# Altium PCB HB_mini_panel.PcbDoc
Units mm, origin at the board's own origin, x right, y up, seen from the top; angles counter-clockwise.
Board outline 70 x 70 mm, 2 copper layers (Top Layer, Bottom Layer), stack 0.971 mm thick; 4 components, 0 nets, 4 pads, 0 vias.
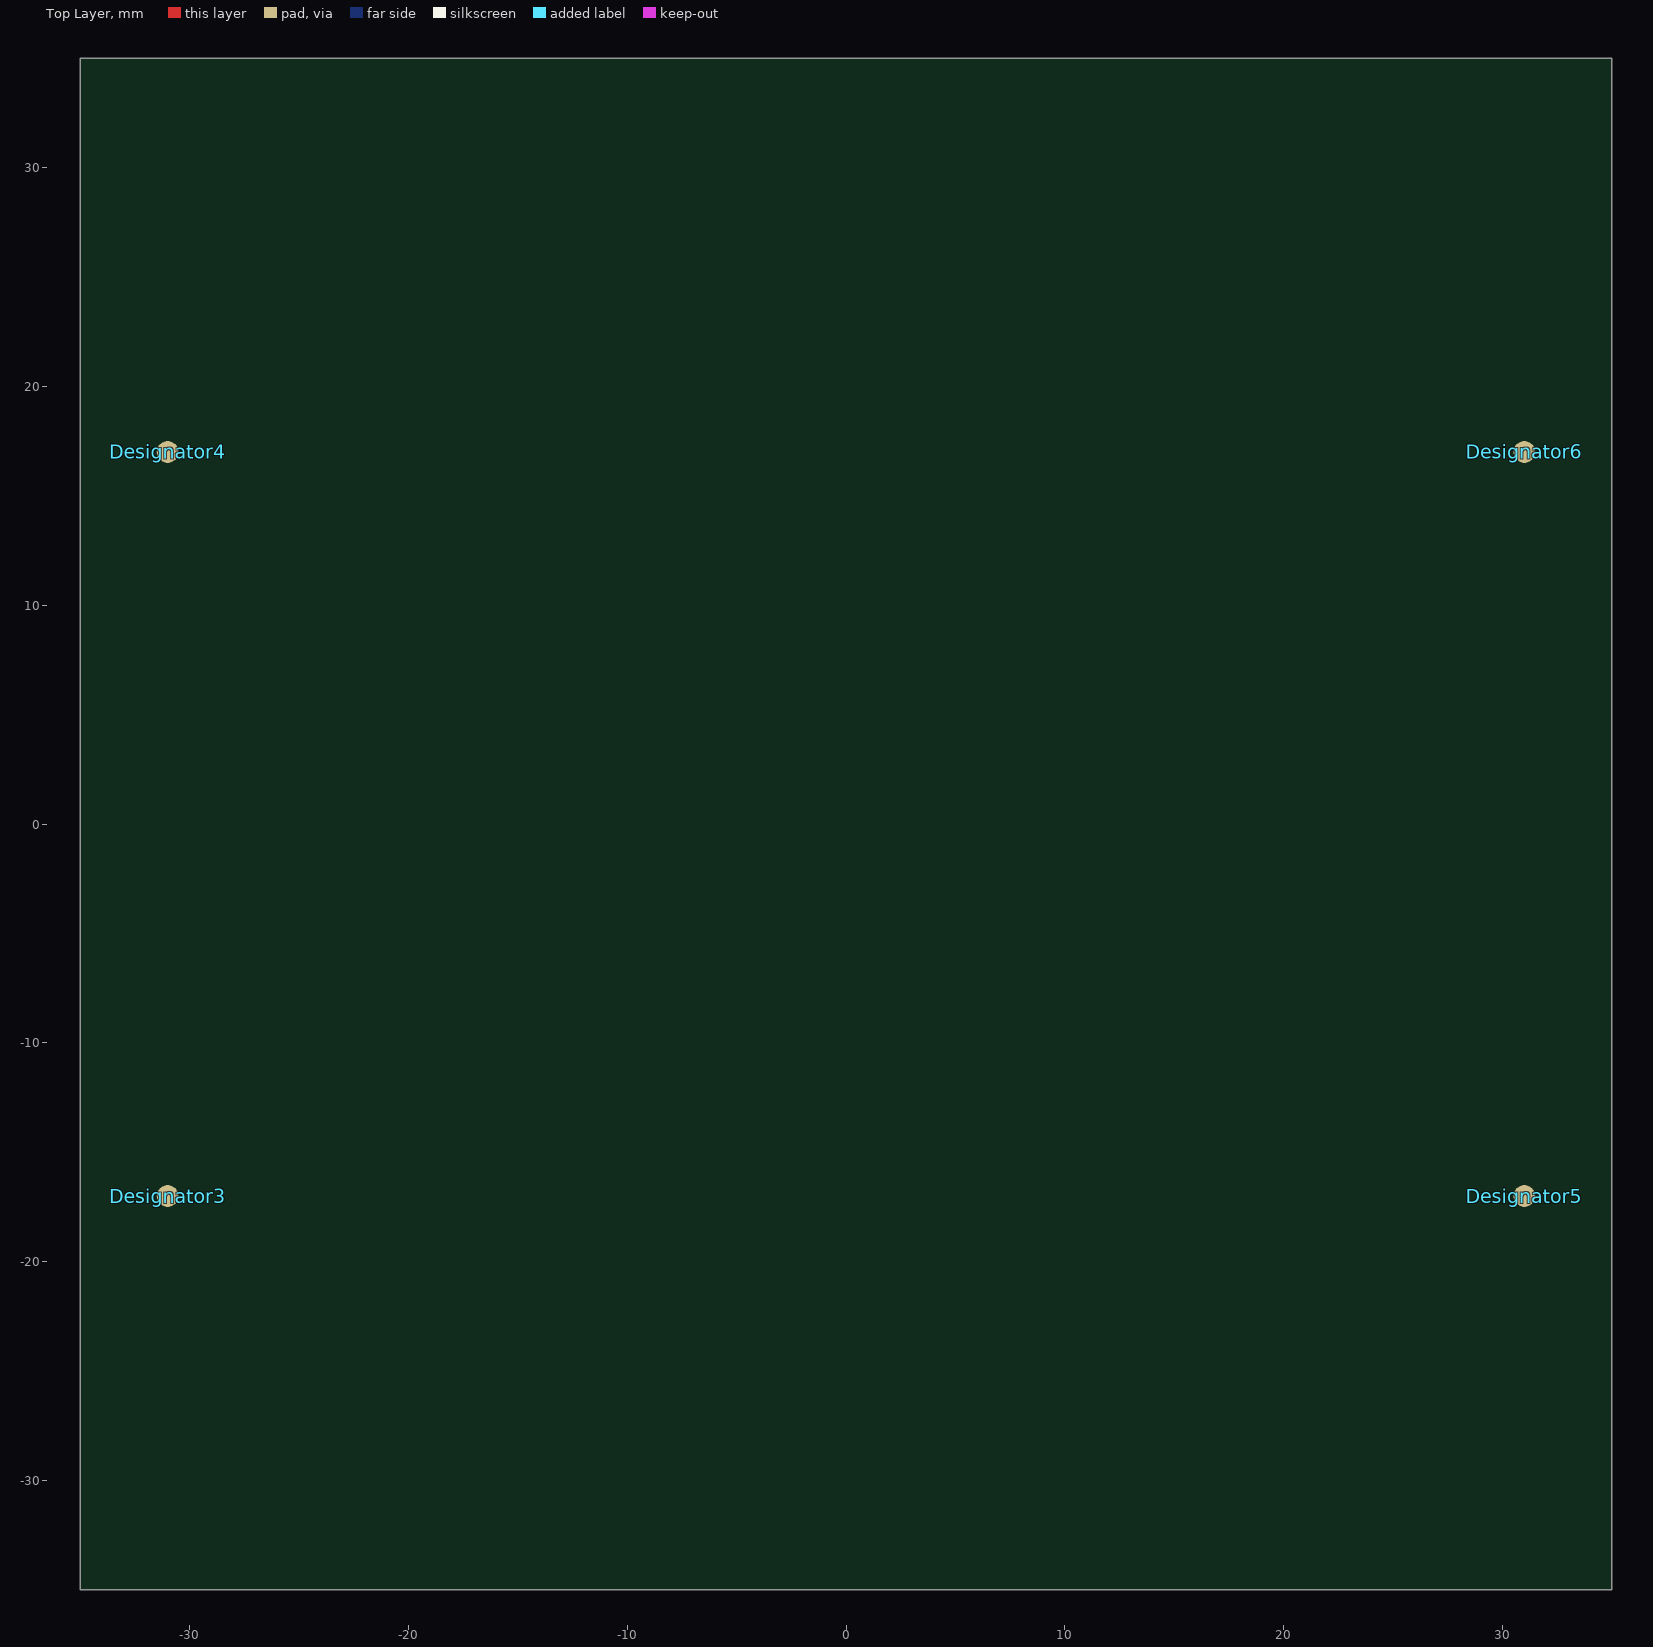
[diagram p0: Top Layer view]
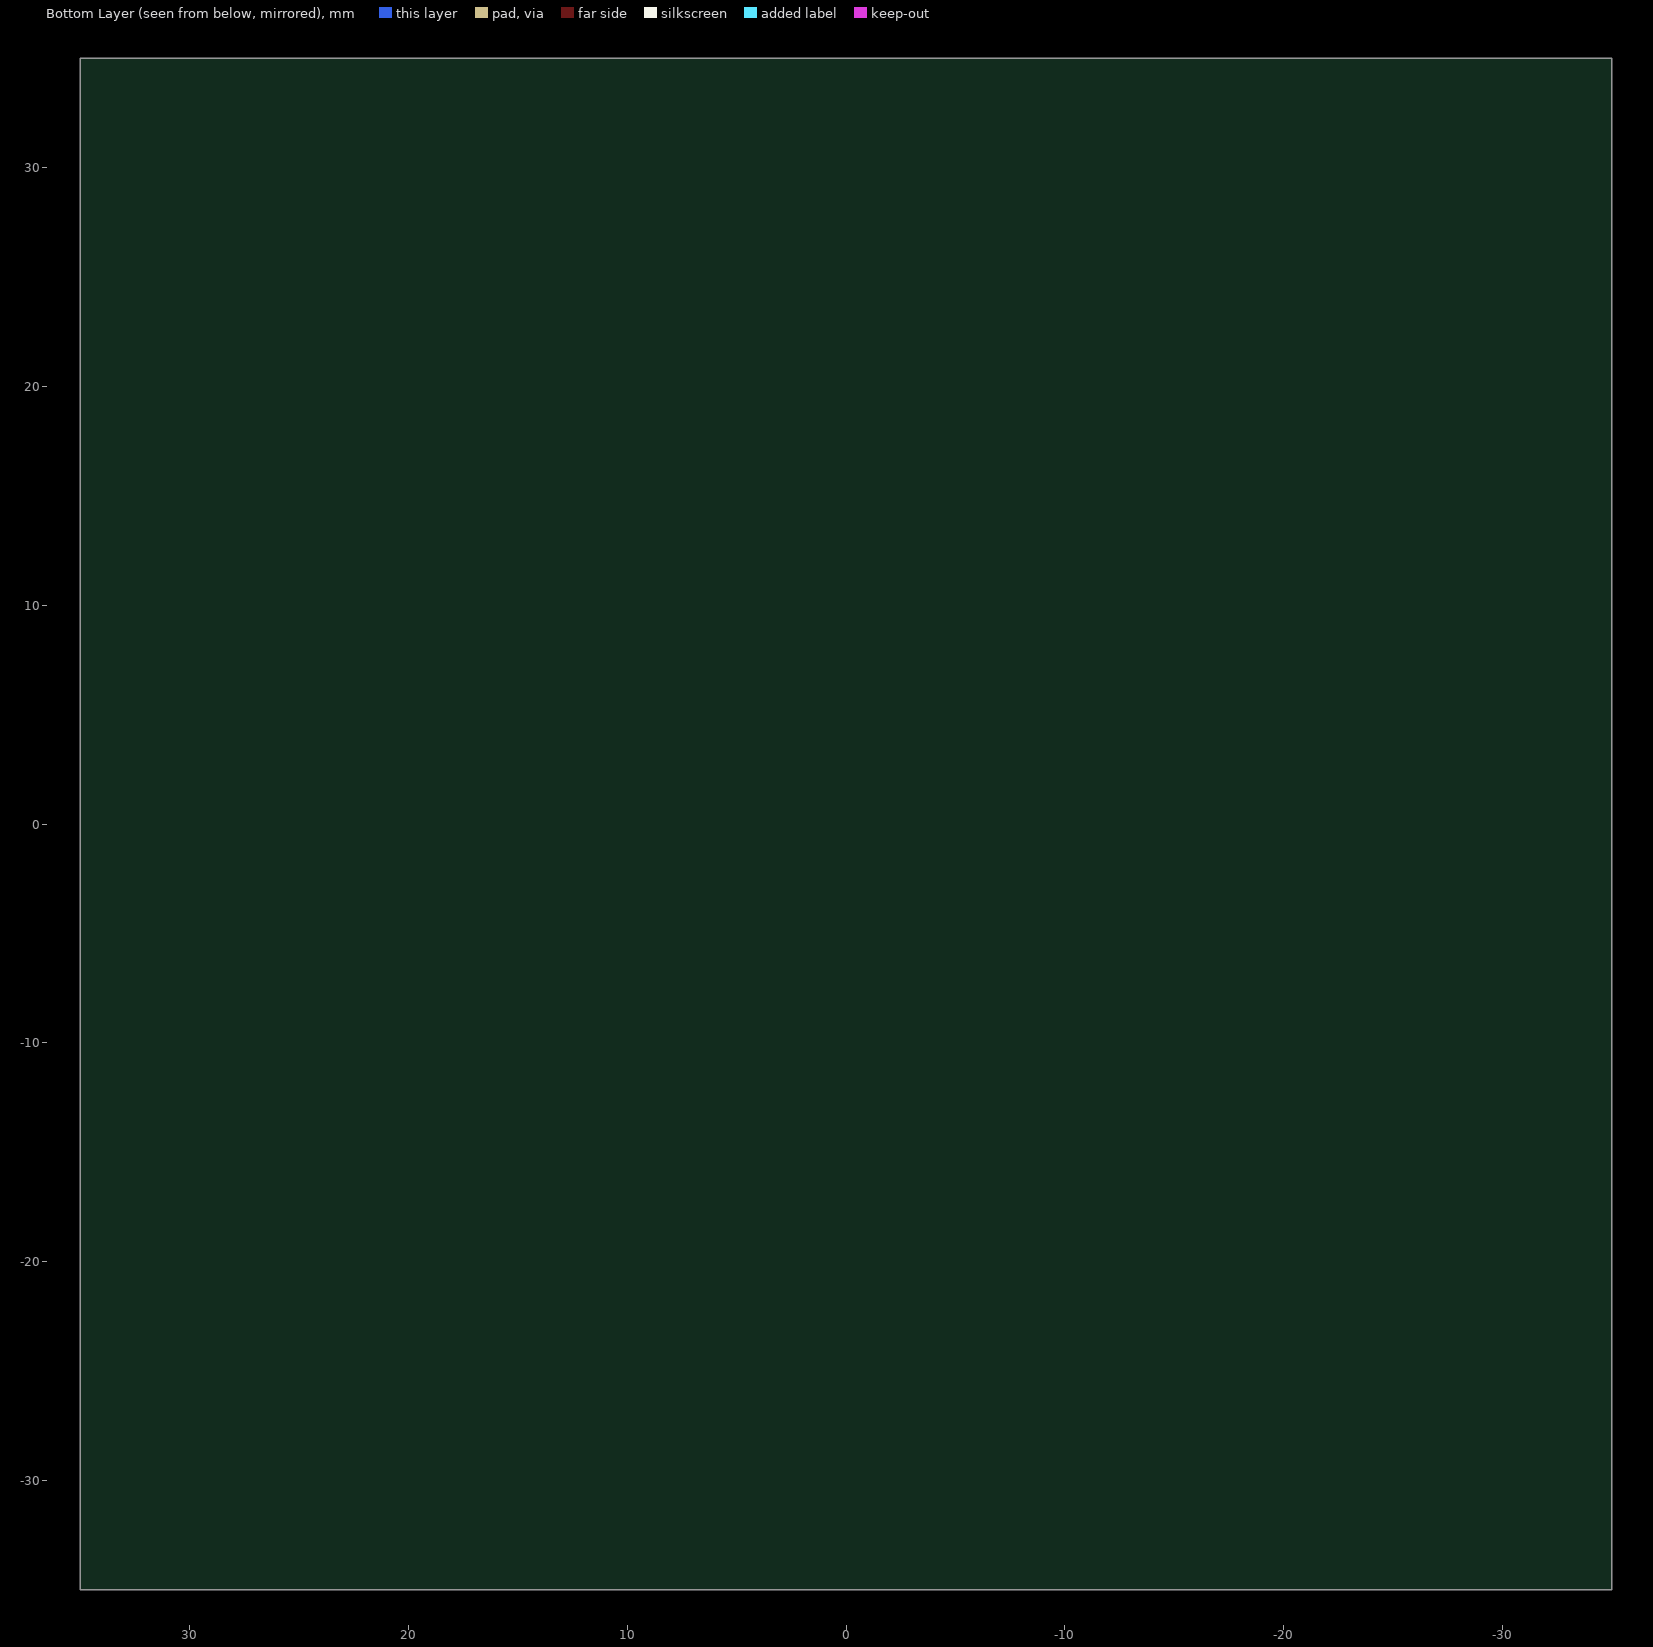
[diagram p1: Bottom Layer view, seen from below]

## Layer stack, top to bottom
Top Solder: solder mask 0.0102, Solder Resist, Dk 3.5
Top Layer: signal copper 0.0356
Dielectric 1: dielectric 0.9, FR-4, Dk 4.8
Bottom Layer: signal copper 0.0356
Bottom Solder: solder mask 0.0102, Solder Resist, Dk 3.5

## Board outline
-35,-35 35,-35 35,35 -35,35

## Design rules (kind name [scope] priority, off if disabled: settings)
Clearance [All] p1: gap=0.254 ignorepadtopadclearanceinfootprint=FALSE except(0: Arc-Hole Track-Hole SMDPad-Hole THPad-Hole Via-Hole Fill-Hole Poly-Hole Region-Hole Text-Hole)
PolygonConnect [All] p1: connectstyle=Relief reliefconductorwidth=0.254 reliefentries=4 polygonreliefangle="90 Angle" airgapwidth=0.254
RoutingVias [All] p1: holewidth=0.711 width=1.27 viastyle="Through Hole" minholewidth=0.711 minwidth=1.27 maxholewidth=0.711 maxwidth=1.27
SolderMaskExpansion [All] p1: expansion=0.102 istentingtop=FALSE
Width [All] p1: maxlimit=0.254 minlimit=0.254 preferedwidth=0.254
30 further rules are at their usual default settings.

## Components (designator, comment, footprint, x,y, rotation, side; value= is the part's Value field where it differs from the comment)
Designator3 "Comment" "JLC FIDUTIAL"#1 -31,-17.25 r0 top
Designator4 "Comment" "JLC FIDUTIAL"#2 -33.5,1 r0 top
Designator5 "Comment" "JLC FIDUTIAL"#3 31,-17 r0 top locked
Designator6 "Comment" "JLC FIDUTIAL"#4 33,4 r0 top

## Footprints (in the part's own frame and the unit in brackets; to place one, negate y for a bottom-side part, rotate by r counter-clockwise, add the part's x,y. Pads: shape width x height; smd on the part's side, far side on the other; paste and mask are expansions set on the pad)
"JLC FIDUTIAL"#1 [mm]
  round 1 smd paste-2539.97 mask+0.5: FID1(0,0.25)
"JLC FIDUTIAL"#2 [mm]
  round 1 smd paste-2539.97 mask+0.5: FID1(2.5,16)
"JLC FIDUTIAL"#3 [mm]
  round 1 smd paste-2539.97 mask+0.5: FID1(0,0)
"JLC FIDUTIAL"#4 [mm]
  round 1 smd paste-2539.97 mask+0.5: FID1(-2,13)

## Nets (pads, with @x,y where several pads share a name; then routed paths per layer and width w, separated by ;. In a path a pad name is that pad's centre, name@x,y a point inside that pad or via, vN(x,y) a via of type N, cw(c..) or ccw(c..) an arc to the next point about the centre after c; other vN are vias at no path point)
pads on no net: Designator3.FID1 Designator4.FID1 Designator5.FID1 Designator6.FID1

## Silkscreen, mask and mechanical layers (free items; w line width, h text height)
Route Tool Path:
  lines w1: -30.2,-39.449 -30.2,-19.8 ccw(c-19.8,-19.8) -19.8,-30.2 ; -30.2,19.8 cw(c-19.8,19.8) -19.802,30.2 ; -30.2,19.807 -30.2,37.222 ; 30.2,-39.533 30.2,-19.8 cw(c19.8,-19.8) 30.2,-19.802 cw(c19.8,-19.8) 19.8,-30.2 ; 30.2,19.8 ccw(c19.8,19.8) 30.2,19.802 ; 30.2,37.222 30.2,19.802 ; -19.802,30.2 cw(c-19.8,29.7) -19.8,30.2 ; -19.802,30.2 cw(c-19.8,19.8) -19.8,30.2 ; -19.8,-30.2 -8.05,-30.2 ccw(c-8.05,-28.7) -6.55,-28.702 ; -19.8,-30.2 -19.8,-30.2 ; -19.8,-30.2 -19.8,-30.2 ; -19.8,30.2 19.8,30.2 ; -6.55,-28.702 ccw(c-7.05,-28.7) -6.55,-28.7 ; -6.55,-28.702 ccw(c-8.05,-28.7) -6.55,-28.7 ; -6.55,-28.7 -6.55,-25.202 ; -6.55,-25.202 ccw(c-7.05,-25.2) -6.55,-25.2 ; -6.55,-25.202 -6.55,-25.2 ; -6.55,-25.2 cw(c-6.05,-25.2) -6.05,-24.7 ; -6.05,-24.7 ccw(c-6.05,-24.2) -6.048,-24.7 ; -6.05,-24.7 -6.048,-24.7 ; -6.048,-24.7 8.048,-24.7 ; 8.048,-24.7 ccw(c8.05,-24.2) 8.05,-24.7 ; 8.048,-24.7 8.05,-24.7 ; 8.05,-24.7 cw(c8.05,-25.2) 8.55,-25.2 ; 8.55,-25.202 cw(c9.05,-25.2) 8.55,-25.2 ; 8.55,-25.202 8.55,-25.2 ; 8.55,-25.202 8.55,-28.7 ccw(c10.05,-28.7) 10.05,-30.2 19.8,-30.2 ; 19.8,-30.2 19.8,-30.2 ; 19.8,30.2 cw(c19.8,19.8) 19.802,30.2 ; 19.8,30.2 cw(c19.8,29.7) 19.802,30.2 ; 19.802,30.2 cw(c19.8,19.8) 30.2,19.802 ; 30.2,19.802 30.2,19.802
  text "ROUTE TOOL PATH" at -94,-57 h6
VCUT:
  lines w0.4: -29.7,-42.878 -29.7,40.238 ; 29.7,-42.679 29.7,40.278
  text "V-CUT" at -68,-48 h6

## Panel: embedded boards
"HB_mini_alt_PCB.PcbDoc" at -29.7,-29.7, 1 rows x 1 columns, spacing 63.5 x 38.1, rotation 0